# Altium PCB vt18_cpu_board.PcbDoc (part 2 of 7)
Units mil, origin at the board's own origin, x right, y up, seen from the top; angles counter-clockwise.
Board outline 2283.46 x 2244.09 mil, 8 copper layers (Top Layer, GND1, Signal Layer 1, POWER1, POWER2, Signal Layer 2, GND2, Bottom Layer), stack 66.304 mil thick; 339 components, 286 nets, 1965 pads, 1047 vias.
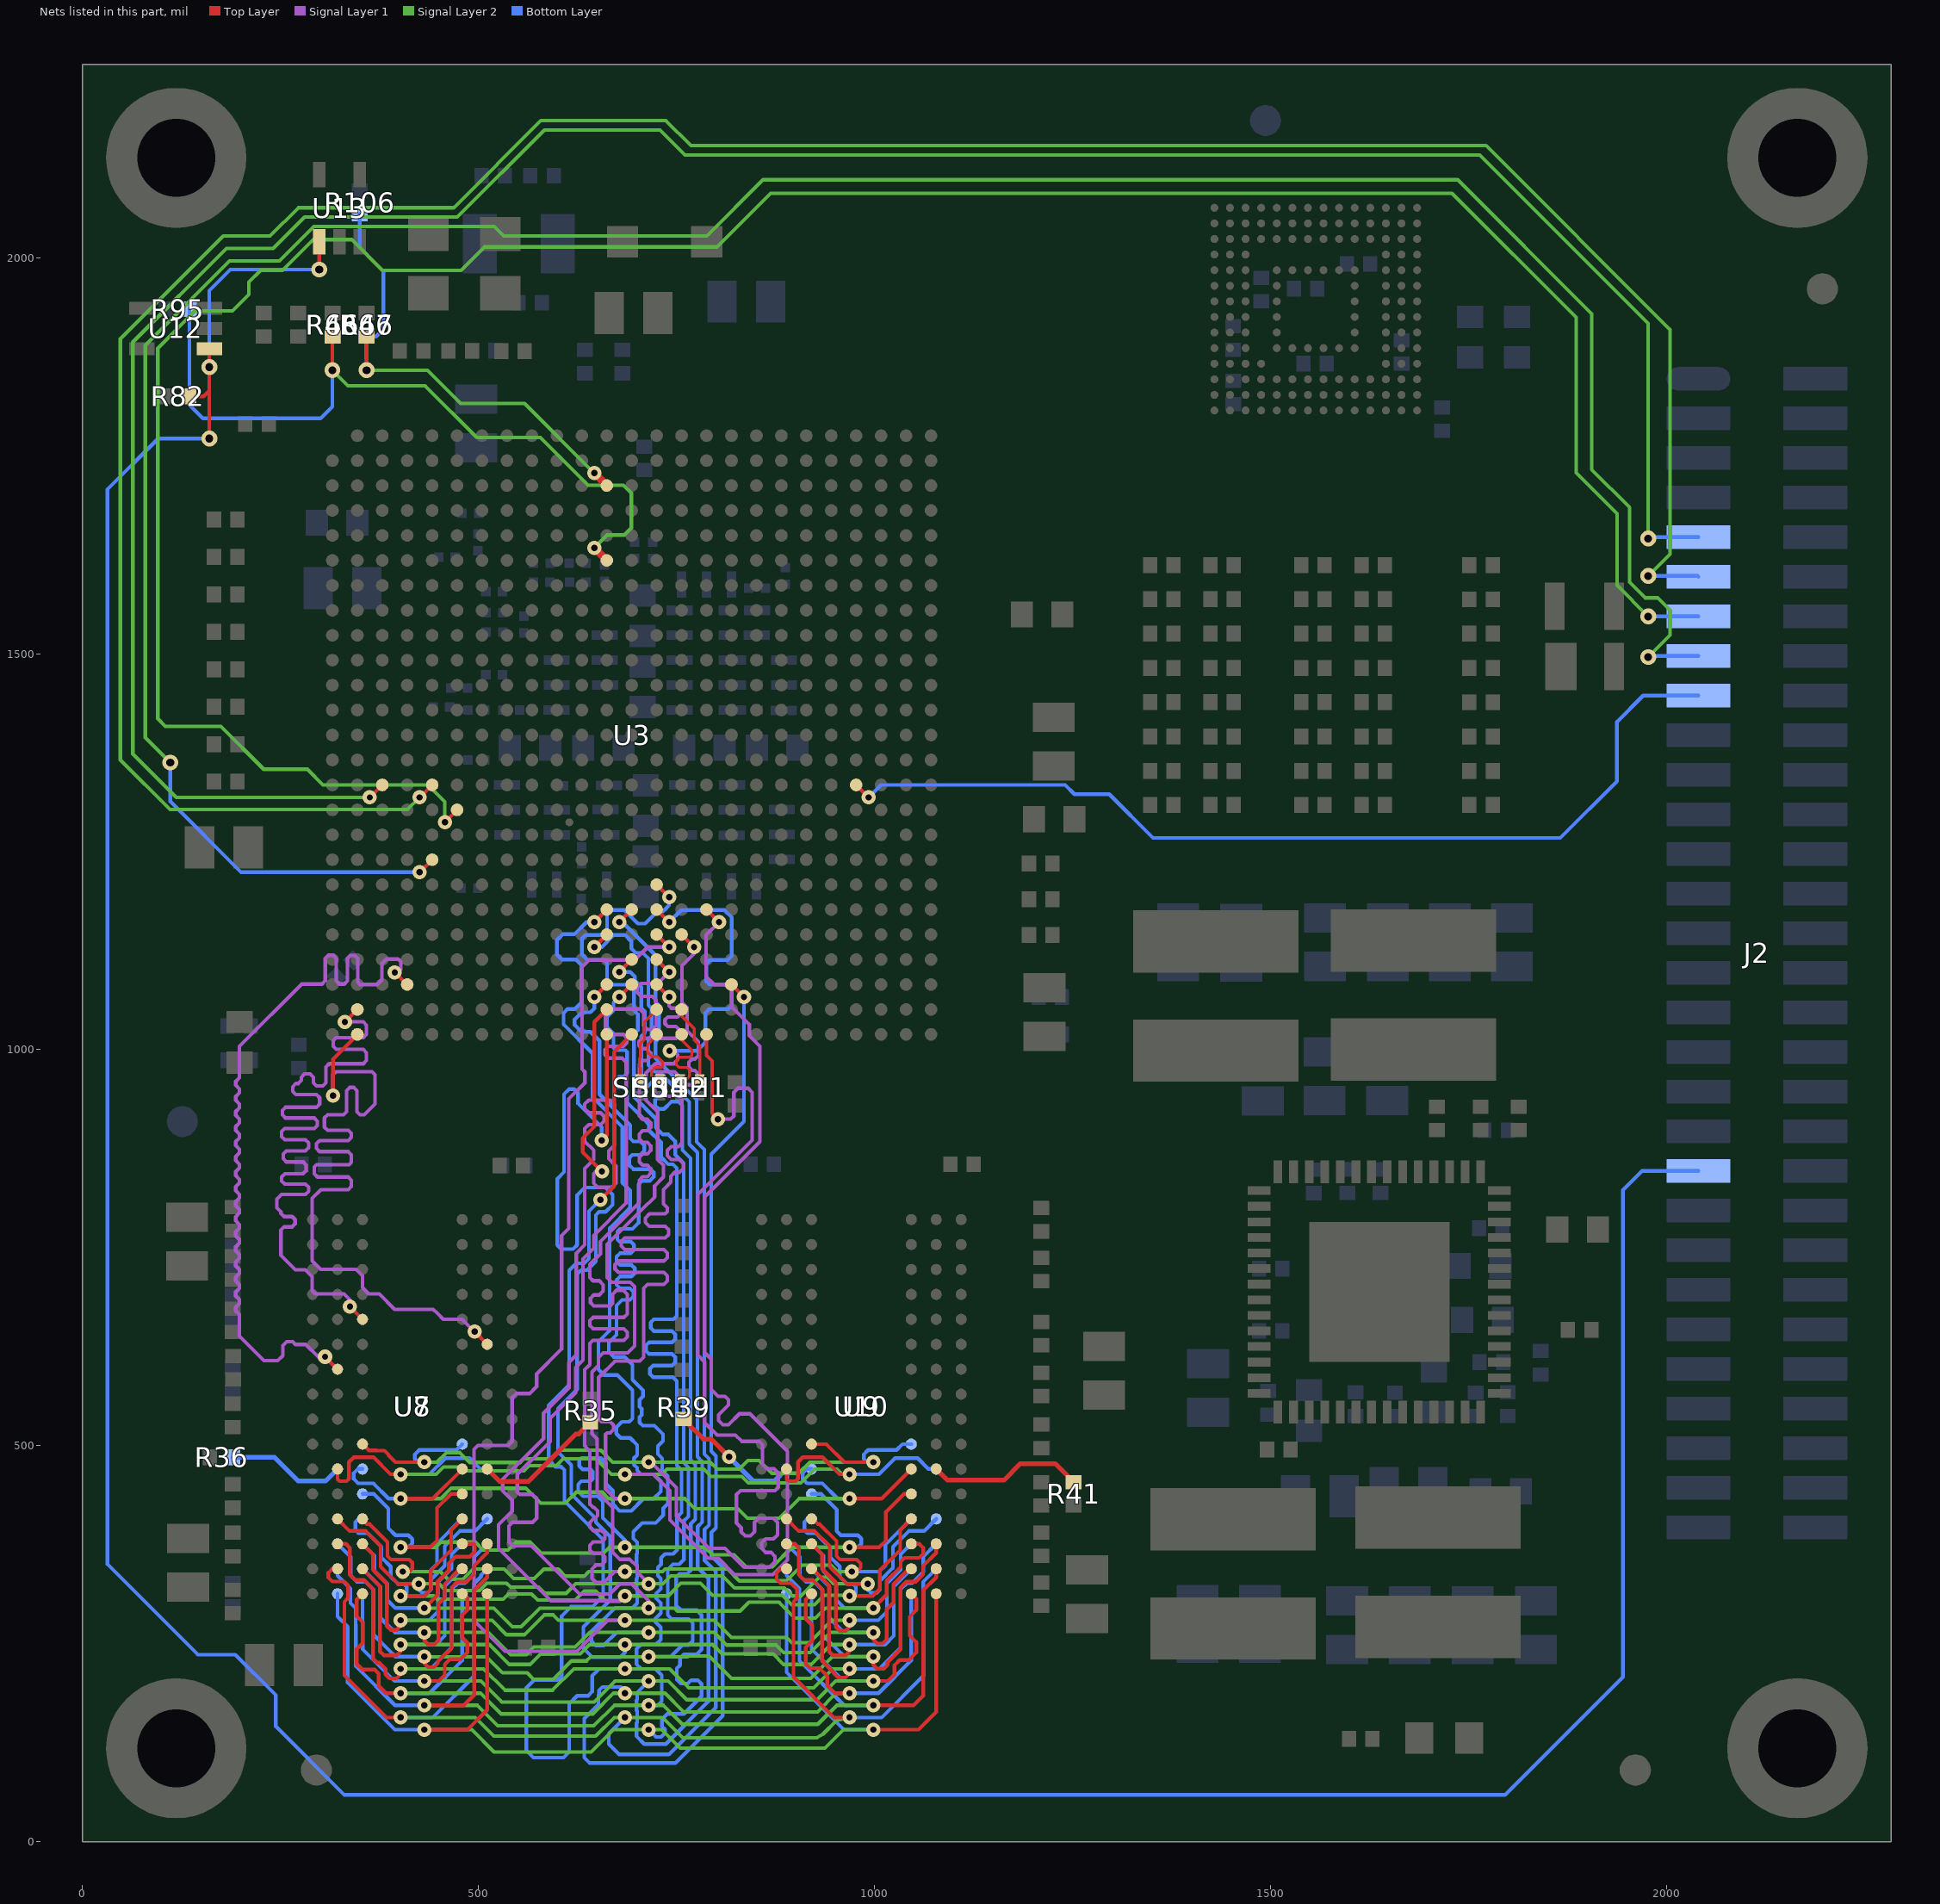
[diagram p8: the nets of this part, all layers, seen from the top]

## Part data
C1 C2 C3 C4 C5 C6 C7 C8 C9 C10 C11 C12 C13 C14 C15 C16 C17 C18 C19 C20 C21 C22 C23 C24 C25 C26 C27 C28 C29 C30 C31 C32 C33 C34 C35 C36 C37 C38 C39 C40 C41 C42 C43 C44 C45 C46 C47 C48 C49 C50 C51 C52 C53 C54 C55 C56 C57 C58 C59 C60 C61 C62 C63 C64 C65 C66 C67 C68 C69 C70 C71 C72 C73 C74 C75 C76 C77 C78 C79 C80 C81 C82 C83 C84 C85 C86 C87 C88 C89 C90 C91 C92 C93 C94 C95 C96 C97 C98 C99 C100 C101 C102 C103 C104 C105 C106 C107 C108 C109 C110 C111 C112 C113 C114 C115 C116 C117 C118 C119 C120 C121 C122 C123 C124 C125 C126 C127 C128 C129 C130 C131 C132 C133 C134 C135 C136 C137 C138 C139 C140 C141 C142 C143 C144 C145 C146 C147 C148 C149 C150 C151 C152 C153 C154 C155 C156 C157 C158 C159 C160 C161 C162 C163 C164 C165 C166 C167 C168 C169 C170 C171 C172 C173 C174 C175 C176 C177 C178 C179 C180 C181 C182 C183 C184 C185 C186 C187 C188 C189 C190 C191 C192 C193 C194 C195 C196 C197 C198: library part Cap, "Capacitor"
D1: library part LN01401_1
D2: library part "Diode 11DQ03", "Schottky Rectifier"
J2: library part "Header 30X2", "Header, 30-Pin, Dual row"
L1 L2: library part INDUCTOR, "IND PWR 1UH@100KHZ 2.65A 20% SMT"
L3 L4: library part INDUCTOR, "IND PWR 1UH@1MHZ 2A 30% SMT"
L5: library part Inductor, "Inductor"
R1 R2 R3 R4 R5 R6 R7 R8 R9 R10 R11 R12 R13 R14 R15 R16 R17 R18 R19 R20 R21 R22 R23 R24 R25 R26 R27 R28 R29 R30 R31 R32 R33 R34 R35 R36 R37 R38 R39 R40 R41 R42 R44 R45 R46 R47 R48 R49 R50 R51 R52 R53 R54 R55 R56 R57 R58 R59 R60 R61 R62 R63 R64 R65 R66 R67 R68 R69 R70 R71 R72 R73 R74 R75 R76 R77 R78 R79 R80 R81 R82 R83 R84 R85 R86 R87 R88 R89 R90 R91 R92 R93 R94 R95 R96 R97 R98 R99 R100 R101 R102 R103 R104 R105 R106 R107 R108 R109 R110 R111 R112 R113 R114 R115 R116 R117 R118: library part Res3, "Resistor"
SH1 SH2 SH3 SH4: library part RES_SHORT-2, "ZERO OHM CUT TRACE 0201 PADS; NO PART TO ORDER"
U1: library part MMPF0100NPZES_56P, "IC POWER MANAGEMENT 2.8-4.5V QFN56"
U2: library part eMMC-153BALL
U3: library part PCIMX6Q6VV1A, "IC MCU MX6QUAD ARM CORTEX-A9 FCPBGA624"
U7 U8 U9 U10: library part 2G_DDR3_SDRAM_128MX16_96P, "IC MEM DDR3 SDRAM 2Gb 128MX16 1.35V FBGA96"
U14: library part STM6315
Y1: library part XTAL_13Y_A, "XTAL 24MHZ -- 3.2X2.5MM SMT"
Y2: library part XTAL, "XTAL 32.768KHZ 12.5PF 20PPM 3.2X1.5MM SMT"

## Free pads (board coordinates)
  rect 216.54x216.54 on Bottom Solder: 1(118.11,118.11) 1(118.11,2125.98) 1(2165.35,118.11) 1(2165.35,2125.98)
  round 10 smd: EndPad(614.64,1287.1)
  round 177.17 hole 98.43: MT1(118.11,2125.98) MT2(2165.35,2125.98) MT3(118.11,118.11) MT4(2165.35,118.11)
  round 39.37 smd far side paste-19.68 mask+23.62: ""(125.98,909.34) ""(1493.68,2173.23) ""(1960.63,90.55)
  round 39.37 smd paste-19.68 mask+23.62: ""(295.28,90.55) ""(1960.63,90.55) ""(2196.85,1960.75)

## Via types
v1: diameter 18, hole 8, Top Layer to Bottom Layer, tented both sides, 718 vias
v2: diameter 20, hole 10, Top Layer to Bottom Layer, tented both sides, 300 vias
v3: diameter 25, hole 15, Top Layer to Bottom Layer, tented both sides, 27 vias
v4: diameter 17.99, hole 7.99, Top Layer to Bottom Layer, tented both sides, 2 vias

## Nets (pads, with @x,y where several pads share a name; then routed paths per layer and width w, separated by ;. In a path a pad name is that pad's centre, name@x,y a point inside that pad or via, vN(x,y) a via of type N, cw(c..) or ccw(c..) an arc to the next point about the centre after c; other vN are vias at no path point)
ACC: J2.17 U3.R22 | length 1222.7
  Top Layer w4.7: U3.R22@976.84,1334.35 v1(992.59,1318.61)
  Bottom Layer w4.7: v1(992.59,1318.61) 1008.34,1334.36 1240.63,1334.35 1252.44,1322.54 1296.46,1322.54 1351.57,1267.43 1865.9,1267.43 1937.48,1339 1937.48,1414.05 1970.47,1447.05 J2.17@2040.35,1447.05
BM-SEL: J2.41 R82.2 U12.1 U13.1 | length 4774.5
  Top Layer w4.5: v2(298.89,1985) U13.1@298.89,2019.96
  Top Layer w4.7: R82.2@134.52,1825 152.83,1825 160,1832.17 ; v2(160,1771.65) 160,1832.17 ; U12.1@160,1885 v2(160,1861.91) 160,1832.17
  Bottom Layer w4.5: v2(160,1861.91) 160,1958.24 186.76,1985 v2(298.89,1985)
  Bottom Layer w4.7: v2(160,1771.65) 95.47,1771.65 31.5,1707.68 31.5,350.39 145.67,236.22 192.91,236.22 244.09,185.04 244.09,145.67 330.71,59.06 1796.03,59.06 1944.88,207.9 1944.88,822.77 1969.16,847.05 J2.41@2040.35,847.05
BOOT-MODE0: R47.1 R66.2 R106.1 U3.C12 | length 631.3
  Top Layer w4.5: v2(358.74,1857.98) v2(358.74,1857.98) 358.78,1872.67
  Top Layer w4.7: 358.78,1872.67 R47.1@358.78,1900.59
  Top Layer w10: v1(646.13,1728.05) U3.C12@661.88,1712.3
  Signal Layer 2 w4.5: v2(358.74,1857.98) 435.38,1857.98 477.36,1816 558.18,1816 v1(646.13,1728.05)
  Bottom Layer w4.7: R106.1@350,2055 350,2012.67 380,1982.67 380,1910 370.59,1900.59 R66.2@358.78,1900.59 v2(358.74,1857.98) v2(358.74,1857.98)
BOOT-MODE1: R46.1 R65.2 R95.1 U3.F12 | length 1011.2
  Top Layer w4.5: v2(315.43,1857.98) v2(315.43,1857.98) 315.48,1872.5
  Top Layer w4.7: 315.48,1872.5 R46.1@315.48,1900.59
  Top Layer w10: v1(646.13,1633.56) U3.F12@661.88,1617.81
  Signal Layer 2 w4.5: v2(315.43,1857.98) 335.11,1838.29 432.5,1838.29 497.8,1773 578,1773 638.15,1712.85 682.82,1712.85 692.98,1702.69 692.98,1658.92 683.93,1649.86 662.43,1649.86 v1(646.13,1633.56)
  Bottom Layer w4.7: R95.1@135,1935 135,1814 151.95,1797.05 300.52,1797.05 315.43,1811.96 v2(315.43,1857.98) 315.43,1900.55 R65.2@315.48,1900.59
CAN1-RXD: J2.11 U3.R5 | length 3534.8
  Top Layer w4.7: v1(425.66,1318.61) U3.R5@441.41,1334.35
  Signal Layer 2 w4.5: v1(425.66,1318.61) 410.23,1303.17 110.39,1303.17 47.71,1365.85 47.71,1897.35 177.63,2027.27 236.69,2027.27 272.41,2062.99 468.5,2062.99 578.74,2173.23 736.4,2173.23 768.18,2141.44 1772.12,2141.44 2004.4,1909.16 2004.4,1625.69 v2(1976.85,1598.13) v2@1980.78,1598.13
  Bottom Layer w4.7: v2(1976.85,1598.13) 2039.27,1598.13 J2.11@2040.35,1597.05
CAN1-TXD: J2.9 U3.R3 | length 3325.4
  Top Layer w4.7: v1(362.67,1318.61) U3.R3@378.42,1334.35
  Signal Layer 2 w4.5: v1(362.67,1318.61) 118.34,1318.61 63.46,1373.49 63.46,1893.41 181.57,2011.52 240.7,2011.52 280.36,2051.18 473.18,2051.18 583.13,2161.13 729.1,2161.13 760.6,2129.63 1764.25,2129.63 1976.85,1917.03 v2(1976.85,1645.38)
  Bottom Layer w4.7: v2(1976.85,1645.38) 1978.51,1647.05 J2.9@2040.35,1647.05
CAN2-RX: J2.15 U3.V5 | length 3515.2
  Top Layer w4.7: v1(425.66,1224.11) U3.V5@441.41,1239.86
  Signal Layer 2 w4.5: v2(110.7,1362.62) 79.21,1394.12 79.21,1889.47 185.51,1995.77 248.58,1995.77 292.17,2039.37 519.86,2039.37 531.96,2027.27 788.15,2027.27 859.31,2098.43 1736.22,2098.43 1905.51,1929.13 1905.51,1732.46 1953.22,1684.75 1953.22,1590.26 1972.91,1570.57 1988.66,1570.57 2004.4,1554.83 2004.4,1523.33 v2(1976.85,1495.77)
  Bottom Layer w4.7: v2(110.7,1362.62) 110.7,1313.56 200.15,1224.11 v1(425.66,1224.11) ; v2(1976.85,1495.77) 1978.12,1497.05 J2.15@2040.35,1497.05
CAN2-TX: J2.13 U3.T6 | length 3378.6
  Top Layer w4.7: v1@457.39,1287.11 v1(457.39,1287.33) U3.T6@472.91,1302.85
  Signal Layer 2 w4.5: v1(457.39,1287.33) 457.39,1313.04 436.08,1334.35 303.62,1334.35 283.82,1354.15 228.7,1354.15 174.56,1408.29 104.55,1408.29 94.96,1417.89 94.96,1885.54 142.2,1932.78 189.44,1932.78 210,1953.34 210,1969.08 224.88,1983.96 252.44,1983.96 291.34,2022.86 339.8,2022.86 378.71,1983.96 477.97,1983.96 507.54,2013.53 800.93,2013.53 868.66,2081.26 1729.15,2081.26 1885.83,1924.59 1885.83,1728.52 1937.48,1676.87 1937.48,1586.32 v2(1976.85,1546.95)
  Bottom Layer w4.7: v2(1976.85,1546.95) 1976.94,1547.05 J2.13@2040.35,1547.05
DDR_SDCLK0: SH1.1 U3.AD15 | length 97.6
  Top Layer w3.7: U3.AD15@756.37,1050.88 756.37,1042.35 772.12,1026.6 772.12,1012.34 779.38,1005.08 SH1.1@779.38,962.85
DDR_SDCLK0_B: SH2.1 U3.AE15 | length 99.9
  Top Layer w3.7: SH2.1@754.38,962.85 762.38,962.85 766.14,966.61 766.14,974.58 763.08,977.64 753.1,977.64 749.38,981.36 749.38,985.88 753.84,990.34 766.38,990.34 769.38,993.34 769.38,999.34 756.37,1012.35 U3.AE15@756.37,1019.39
DDR_SDCLK1: SH3.1 U3.AD14 | length 97.4
  Top Layer w3.7: SH3.1@704.38,962.85 704.38,977.34 703.38,978.34 703.38,989.34 704.38,990.34 704.38,1008.12 709.13,1012.86 709.13,1035.14 U3.AD14@724.88,1050.88
DDR_SDCLK1_B: SH4.1 U3.AE14 | length 92.3
  Top Layer w3.7: U3.AE14@724.88,1019.39 724.88,1018.17 716.83,1010.12 716.83,1009.66 713.38,1006.21 713.38,996.34 718.38,991.34 725.72,991.34 732.38,984.68 732.38,979.34 730.38,977.34 722.62,977.34 718.38,973.1 718.38,967.09 722.62,962.85 SH4.1@729.38,962.85
DRAM0_ZQ: R35.2 U8.L8 | length 167.6
  Top Layer w6: U8.L8@510.93,470.61 526.69,454.85 562.88,454.85 622.95,514.92 626.44,514.92 R35.2@641.1,529.58
DRAM1_ZQ: R36.2 U7.L8 | length 150.6
  Bottom Layer w6: R36.2@190.14,485.34 242.38,485.34 272.38,455.34 306.7,455.34 U7.L8@321.96,470.61
DRAM2_ZQ: R41.2 U10.L8 | length 197.7
  Top Layer w6: U10.L8@1077.86,470.61 1092.08,456.4 1163.34,456.4 1184.29,477.34 1228.14,477.34 R41.2@1251.38,454.1
DRAM3_ZQ: R39.2 U9.L8 | length 168.9
  Top Layer w6: R39.2@758.7,533.58 783.94,508.34 793.84,508.34 v1(816.38,485.8)
  Bottom Layer w6: v1(816.38,485.8) 846.84,455.34 873.38,455.34 879.68,461.64 879.93,461.64 U9.L8@888.89,470.61
DRAM_A0: U3.AC14 U7.N3 U8.N3 U9.N3 U10.N3 | length 2366.3
  Top Layer w4.7: U8.N3@353.45,407.62 353.46,406.53 358.95,401.04 362.37,401.04 385.08,378.33 385.08,360.71 389.45,356.34 412.38,356.34 416.1,352.62 416.1,344.81 412.38,341.09 v1(404.45,341.09) ; U3.AC14@724.88,1082.38 v1(740.62,1066.63) ; U10.N3@920.38,407.62 922.12,407.61 928.69,401.04 930.61,401.04 952.01,379.64 952.01,360.71 956.38,356.34 977.38,356.34 982.38,351.34 982.38,346.09 977.38,341.09 v1(971.38,341.09)
  Signal Layer 1 w4.5: v1(684.88,341.09) 672.13,341.09 658.38,327.34 648.38,327.34 643.38,332.34 643.38,344.47 648.38,349.47 655.13,349.47 659.38,353.72 659.38,359.72 655.13,363.97 644.63,363.97 640.38,368.22 640.38,374.22 644.63,378.47 655.13,378.47 659.38,382.72 659.38,388.72 655.13,392.97 644.63,392.97 640.38,397.22 640.38,403.22 644.63,407.47 646.13,407.47 650.38,411.72 650.38,417.72 646.13,421.97 644.63,421.97 640.38,426.22 640.38,493.34 633.94,499.78 633.94,595.91 640.38,602.34 640.38,629.09 644.38,633.09 683.61,633.09 687.86,637.34 687.86,643.34 683.61,647.59 644.63,647.59 640.38,651.84 640.38,657.84 644.63,662.09 683.61,662.09 687.86,666.34 687.86,691.34 682.86,696.34 674.38,696.34 669.38,691.34 669.38,679.59 666.38,676.59 645.41,676.59 641.38,680.62 641.38,686.31 645.41,690.34 652.38,690.34 657.38,695.34 657.38,703.34 652.38,708.34 644.56,708.34 640.56,712.34 640.56,729.02 653.88,742.34 653.88,757.84 702.87,806.83 702.87,835.36 707.12,839.61 713.13,839.61 717.38,843.86 717.38,849.86 713.13,854.11 707.12,854.11 702.87,858.36 702.87,864.36 707.12,868.61 713.13,868.61 717.38,872.86 717.38,878.86 713.13,883.11 707.12,883.11 702.87,887.36 702.87,893.36 707.12,897.61 713.13,897.61 717.38,901.86 717.38,907.86 713.13,912.11 707.12,912.11 702.87,916.36 702.87,981.34 707.87,986.34 712.38,986.34 717.38,991.34 717.38,996.34 712.38,1001.34 706.19,1001.34 702.38,1005.15 702.38,1010.53 706.19,1014.34 749.38,1014.34 754.38,1019.34 754.38,1024.34 749.38,1029.34 738.9,1029.34 735.38,1032.86 735.38,1037.82 738.9,1041.34 751.11,1041.34 754.38,1044.61 754.38,1049.23 751.11,1052.5 743.38,1052.5 740.62,1055.26 v1(740.62,1066.63)
  Signal Layer 2 w4.5: v1(404.45,341.09) 451.63,341.09 461.38,331.34 480.29,331.34 493.29,344.34 532.38,344.34 544.38,332.34 570.38,332.34 582.16,344.12 600.6,344.12 609.38,335.34 633.38,335.34 639.13,341.09 v1(684.88,341.09) 732.38,341.09 735.63,344.34 814.38,344.34 829.38,329.34 888.29,329.34 908.29,349.34 944.88,349.34 953.13,341.09 v1(971.38,341.09)
  Bottom Layer w4.7: v1(404.45,341.09) 437.81,341.09 447.45,350.74 447.45,376.41 478.65,407.61 U7.N3@479.44,407.62 ; v1(971.38,341.09) 1005.86,341.09 1013.73,348.96 1013.73,375.08 1014.61,375.95 1039.7,401.04 1039.8,401.04 U9.N3@1046.37,407.62
DRAM_A1: U3.AB14 U7.P7 U8.P7 U9.P7 U10.P7 | length 2428.4
  Top Layer w4.7: v1(431.45,295.04) 448.5,312.09 448.5,328.77 462.38,342.65 462.38,351.34 470.83,359.79 488.83,359.79 495.38,366.34 495.38,374.14 493.41,376.11 U8.P7@479.43,376.12 ; U3.AB14@724.88,1113.88 v1(740.62,1098.13) ; v1(998.38,295.04) 1015.43,312.09 1015.43,329.39 1033.02,346.98 1033.02,353.5 1038.02,358.5 1056.38,358.5 1061.38,363.5 1061.38,371.11 1056.38,376.11 U10.P7@1046.36,376.12
  Signal Layer 1 w4.5: v1(714.88,295.04) 714.88,304.17 693.41,325.64 678.56,325.64 665.76,312.84 627.28,312.84 566.5,373.61 543.38,373.61 538.38,378.61 538.38,398.84 542.88,403.34 568.38,403.34 573.38,408.34 573.38,416.98 573.43,417.04 573.43,429.67 573.38,429.73 573.38,433.61 568.38,438.61 552.11,438.61 548.93,441.79 548.93,463.86 590.53,505.46 590.53,534.49 622.63,566.59 622.63,598.59 631.88,607.84 631.88,735.84 645.38,749.34 645.38,765.34 686.38,806.34 686.38,984.34 681.38,989.34 663.77,989.34 659.38,993.73 659.38,999.95 663.77,1004.34 682.99,1004.34 687.38,1008.73 687.38,1014.95 682.99,1019.34 665.38,1019.34 660.38,1024.34 660.38,1042.31 669.45,1051.38 703.38,1051.38 708.38,1046.38 708.38,1030.34 713.38,1025.34 719.38,1025.34 724.38,1030.34 724.38,1062.34 719.38,1067.34 705.18,1067.34 700.38,1072.14 700.38,1078.93 705.18,1083.73 726.23,1083.73 v1(740.62,1098.13)
  Signal Layer 2 w4.5: v1(431.45,295.04) 519.18,295.04 542.83,271.39 553.77,271.39 577.42,295.04 v1(714.88,295.04) 747.38,295.04 751.08,291.34 830.38,291.34 841.38,302.34 879.38,302.34 899.38,282.34 925.38,282.34 938.08,295.04 v1(998.38,295.04)
  Bottom Layer w4.7: U7.P7@353.46,376.12 368.45,361.12 368.45,341.88 384.78,325.55 384.78,305.35 395.09,295.04 v1(431.45,295.04) ; U9.P7@920.39,376.12 935.38,361.12 935.38,341.88 951.71,325.55 951.71,305.35 962.02,295.04 v1(998.38,295.04)
DRAM_A2: U3.AA14 U7.P3 U8.P3 U9.P3 U10.P3 | length 2485.7
  Top Layer w4.7: U8.P3@353.45,376.12 366.81,362.76 366.81,343.54 384.21,326.13 384.21,272.34 389.21,267.34 396.45,267.34 401.45,272.34 v1(401.45,279.69) ; U3.AA14@724.88,1145.37 v1(740.62,1129.62) ; U10.P3@920.38,376.12 933.74,362.76 933.74,344.68 951.14,327.28 951.14,271.34 956.14,266.34 963.38,266.34 968.38,271.34 v1(968.38,279.69)
  Signal Layer 1 w4.5: 604.85,684.99 604.85,622.01 573.37,590.53 573.37,574.77 564.44,565.84 547.38,565.84 542.38,560.84 542.38,505.34 537.38,500.34 499.38,500.34 494.38,495.34 494.38,279.34 533.38,240.34 624.03,240.34 663.38,279.69 v1(684.88,279.69) ; 604.87,685.01 604.87,729.14 ; 604.85,729.15 604.85,765.31 613.88,774.34 613.88,937.84 634.28,958.24 634.28,972.01 630.89,975.4 630.89,1104.45 639.82,1113.38 697.42,1113.38 713.66,1129.62 v1(740.62,1129.62)
  Signal Layer 2 w4.5: v1(401.45,279.69) 517.03,279.69 535.33,261.39 557.83,261.39 582.83,286.39 594.2,286.39 600.9,279.69 v1(684.88,279.69) 797.54,279.69 819.38,257.85 888.87,257.85 895.33,251.39 917.83,251.39 946.14,279.69 v1(968.38,279.69)
  Bottom Layer w4.7: v1(401.45,279.69) 437.81,279.69 448.69,290.57 448.69,327.37 466.09,344.77 466.09,362.76 U7.P3@479.44,376.12 ; v1(968.38,279.69) 1004.74,279.69 1015.62,290.57 1015.62,325.86 1033.02,343.26 1033.02,362.76 U9.P3@1046.37,376.12
DRAM_A3: U3.Y14 U7.N2 U8.N2 U9.N2 U10.N2 | length 2482.6
  Top Layer w4.7: U8.N2@321.95,407.62 337.23,392.34 357.38,392.34 376.38,373.34 376.38,347.41 398.05,325.74 v1(424.45,325.74) ; U3.Y14@724.88,1176.87 v1(740.62,1161.12) ; U10.N2@888.88,407.62 904.16,392.34 924.31,392.34 943.31,373.34 943.31,347.41 964.98,325.74 v1(991.38,325.74)
  Signal Layer 1 w4.5: v1(714.88,325.74) 700.13,340.49 700.13,347.41 691.2,356.34 690.58,356.34 690.38,356.54 678.56,356.54 669.38,365.72 669.38,422.15 649.71,441.83 649.71,508.7 643.13,515.28 643.13,593.07 651.4,601.34 651.4,611.36 657.38,617.34 688.38,617.34 696.88,625.84 696.88,700.84 691.38,706.34 668.38,706.34 662.38,712.34 662.38,754.28 706.4,798.29 722.38,814.27 722.38,828.34 733.38,839.34 733.38,854.34 726.13,861.59 726.13,921.59 711.38,936.34 711.38,970.34 723.38,982.34 746.38,982.34 751.38,987.34 751.38,993.64 746.38,998.64 v1(741.13,998.64)
  Signal Layer 2 w4.5: v1(424.45,325.74) 449.98,325.74 458.38,317.34 501.33,317.34 510.38,326.39 535.33,326.39 540.38,321.34 575.64,321.34 583.36,313.62 610.66,313.62 622.78,325.74 v1(714.88,325.74) 732.78,325.74 742.88,335.84 807.88,335.84 823.38,320.34 886.39,320.34 896.39,310.34 906.79,310.34 930.33,333.89 939.83,333.89 947.98,325.74 v1(991.38,325.74)
  Bottom Layer w4.7: v1(424.45,325.74) 424.45,318.34 428.45,314.34 435.99,314.34 439.99,318.34 439.99,330.97 457.39,348.37 457.39,373.35 476.38,392.34 495.67,392.34 U7.N2@510.94,407.62 ; v1(740.62,1161.12) 755.97,1176.47 810.25,1176.47 819.76,1166.96 819.76,1118.34 814.9,1113.48 792.47,1113.48 787.47,1108.48 787.47,1091.77 787.38,1091.68 787.38,1086.34 791.74,1081.98 815.38,1081.98 819.76,1077.6 819.76,1055.66 815.38,1051.28 791.38,1051.28 786.38,1046.28 786.38,1009.34 775.68,998.64 v1(741.13,998.64) ; v1(991.38,325.74) 991.38,318.34 995.38,314.34 1002.92,314.34 1006.92,318.34 1006.92,329.47 1023.31,345.86 1023.31,372.34 1043.31,392.34 1062.6,392.34 U9.N2@1077.87,407.62
DRAM_A4: U3.W14 U7.P8 U8.P8 U9.P8 U10.P8 | length 2741.1
  Top Layer w4.7: v1(431.45,233.64) 431.45,225.34 436.45,220.34 443.68,220.34 448.68,225.34 448.68,227.64 460.15,239.11 461.09,239.11 466.09,244.11 466.09,320.98 473.45,328.34 485.17,328.34 494.31,337.48 494.31,348.27 510.94,364.9 U8.P8@510.93,376.12 ; U3.W14@724.88,1208.36 v1(740.62,1192.62) ; v1(998.38,233.64) 998.38,223.34 1003.38,218.34 1011.58,218.34 1016.58,223.34 1016.58,226.74 1032.83,242.99 1032.83,320.79 1040.38,328.34 1052.1,328.34 1061.24,337.48 1061.24,348.2 1077.87,364.83 U10.P8@1077.86,376.12
  Signal Layer 2 w4.5: v1(431.45,233.64) 510.08,233.64 530.38,213.34 561.38,213.34 569.38,205.34 594.38,205.34 617.38,228.34 636.38,228.34 641.68,233.64 v1(714.88,233.64) 764.11,233.64 765.06,234.59 791.13,234.59 819.38,206.34 919.38,206.34 946.68,233.64 v1(998.38,233.64)
  Bottom Layer w4.7: U7.P8@321.96,376.12 338.45,359.62 338.45,336.34 346.45,328.34 357.37,328.34 367.38,318.33 367.38,290.07 367.24,289.93 367.24,261.55 386.1,242.69 386.1,242.63 395.09,233.64 v1(431.45,233.64) ; 696.68,1050.09 696.98,1049.79 696.98,1049.09 700.98,1045.09 700.98,1024.48 696.68,1020.18 696.38,1019.87 696.38,940.34 724.03,912.69 724.03,901.69 732.73,892.99 739.7,892.99 748.38,884.32 748.38,867.34 758.97,856.75 758.97,478.67 764.48,473.17 765.04,472.61 765.04,454.9 ; 696.68,1050.1 696.38,1050.4 696.38,1075.34 689.74,1081.98 669.74,1081.98 662.28,1089.44 662.28,1109.44 658.24,1113.48 637.24,1113.48 630.38,1120.34 630.38,1139.97 635.38,1144.97 655.01,1144.97 662.28,1152.24 662.28,1171.47 667.28,1176.47 683.99,1176.47 701.17,1159.29 710.33,1159.29 723.05,1172 729.79,1172 734.26,1176.47 734.76,1176.47 740.62,1182.34 v1(740.62,1192.62) ; v1(714.88,233.64) 742.68,233.64 757.38,248.34 765.38,248.34 770.38,253.34 770.38,276.34 765.38,281.34 743.93,281.34 738.93,286.34 738.93,343.89 745.38,350.34 753.38,350.34 759.38,356.34 759.38,405.11 765.03,410.76 765.03,454.89 ; U9.P8@888.89,376.12 905.38,359.62 905.38,336.34 913.38,328.34 924.06,328.34 934.31,318.09 934.31,290.07 934.17,289.93 934.17,261.55 953.03,242.69 953.03,242.63 962.02,233.64 v1(998.38,233.64)
DRAM_A5: U3.AE13 U7.P2 U8.P2 U9.P2 U10.P2 | length 2814.6
  Top Layer w4.7: U8.P2@321.95,376.12 332.45,376.11 337.45,371.11 337.45,337.34 344.45,330.34 355.38,330.34 366.81,318.91 366.81,231.04 371.81,226.04 374.68,226.04 382.54,218.18 382.54,211.34 387.54,206.34 396.45,206.34 401.45,211.34 v1(401.45,218.29) ; v1(653.88,810.64) 671.13,827.89 671.13,997.14 U3.AE13@693.38,1019.39 ; U10.P2@888.88,376.12 899.38,376.11 904.38,371.11 904.38,337.34 911.38,330.34 922.05,330.34 933.74,318.65 933.74,228.29 949.01,213.02 949.01,212.34 954.01,207.34 963.38,207.34 968.38,212.34 v1(968.38,218.29)
  Signal Layer 2 w4.5: v1(401.45,218.29) 506.43,218.29 533.33,191.39 593.43,191.39 620.33,218.29 v1(684.88,218.29) 741.38,218.29 765.33,194.34 923.38,194.34 947.33,218.29 v1(968.38,218.29)
  Bottom Layer w4.7: v1(401.45,218.29) 439.23,218.29 466.09,245.16 466.09,318.12 466.09,318.65 473.91,326.48 482.51,326.48 494.45,338.41 494.45,359.62 U7.P2@510.94,376.12 ; v1(653.88,810.64) 639.38,796.14 639.38,736.34 633.38,730.34 623.38,730.34 614.48,721.44 614.48,576.83 588.54,550.88 588.54,482.19 597.38,473.34 604.38,473.34 608.38,469.34 608.38,430.34 657.38,381.34 657.38,310.34 643.68,296.64 616.68,296.64 605.03,284.99 605.03,209.34 600.03,204.34 570.38,204.34 560.38,194.34 560.38,115.34 569.38,106.34 607.38,106.34 614.38,113.34 614.38,174.34 624.38,184.34 638.38,184.34 643.38,189.34 643.38,209.34 652.33,218.29 v1(684.88,218.29) ; v1(968.38,218.29) 1006.16,218.29 1033.02,245.16 1033.02,318.65 1040.84,326.48 1047.51,326.48 1061.38,340.34 1061.38,359.62 U9.P2@1077.87,376.12
DRAM_A6: U3.AC13 U7.R8 U8.R8 U9.R8 U10.R8 | length 2815.1
  Top Layer w4.7: v1(431.45,172.24) 481.35,172.24 494.45,185.34 494.45,317.34 510.94,333.83 U8.R8@510.93,344.63 ; v1(677.63,1066.63) U3.AC13@693.38,1082.38 ; v1(998.38,172.24) 1049.38,172.24 1061.38,184.24 1061.38,317.34 1077.87,333.83 U10.R8@1077.86,344.63
  Signal Layer 2 w4.5: v1(431.45,172.24) 498.48,172.24 524.33,146.39 645.53,146.39 671.38,172.24 v1(714.88,172.24) 733.38,172.24 757.28,148.34 928.38,148.34 952.28,172.24 v1(998.38,172.24)
  Bottom Layer w4.7: U7.R8@321.96,344.63 321.96,335.83 338.24,319.55 338.24,301.39 344.76,294.87 344.76,274.1 344.87,273.99 344.87,221.92 394.55,172.24 v1(431.45,172.24) ; v1(677.63,1066.63) 670.38,1059.38 670.38,1049.6 662.28,1041.5 662.28,1028.78 670.38,1020.68 670.38,1002.34 673.38,999.34 685.38,999.34 687.38,997.34 687.38,970.34 683.38,966.34 677.38,966.34 672.38,961.34 672.38,956.34 676.38,952.34 682.38,952.34 687.38,947.34 687.38,933.58 705.93,915.03 709.08,911.87 715.33,905.61 715.33,898.08 730.38,883.03 730.38,864.34 739.38,855.34 745.38,855.34 750.27,850.45 750.27,663.72 746.27,659.72 721.38,659.72 717.38,655.72 717.38,648.74 721.38,644.74 744.38,644.74 748.38,640.74 748.38,634.65 744.38,630.65 715.38,630.65 711.78,627.05 711.78,619.55 715.38,615.95 744.38,615.95 748.38,611.95 748.38,605.25 744.38,601.25 720.38,601.25 716.38,597.25 716.38,590.55 720.38,586.55 745.38,586.55 750.27,581.66 750.27,475.06 755.78,469.56 756.33,469.01 756.33,415.53 750.68,409.88 750.68,368.34 745.68,363.34 735.38,363.34 730.38,358.34 730.38,350.23 726.38,346.23 726.38,335.95 730.23,332.1 730.23,319.38 724.38,313.53 724.38,307.25 730.23,301.4 730.23,288.68 723.38,281.83 723.38,277.55 730.23,270.7 730.23,255.19 724.03,248.99 705.03,248.99 699.38,243.34 699.38,224.34 705.43,218.29 723.43,218.29 731.38,210.34 731.38,177.34 726.28,172.24 v1(714.88,172.24) ; U9.R8@888.89,344.63 888.89,335.83 905.17,319.55 905.17,228.55 961.48,172.24 v1(998.38,172.24)
DRAM_A7: U3.Y13 U7.R2 U8.R2 U9.R2 U10.R2 | length 2917.1
  Top Layer w4.7: U8.R2@321.95,344.63 315.38,344.62 310.38,339.62 310.38,333.58 315.38,328.58 330.31,328.58 335.31,323.58 335.31,307.59 330.66,302.94 330.66,210.05 383.84,156.89 v1(401.45,156.89) ; v1(677.63,1161.12) U3.Y13@693.38,1176.87 ; U10.R2@888.88,344.63 881.38,344.62 876.38,339.62 876.38,331.47 881.37,326.48 894.41,326.48 902.24,318.65 902.24,307.59 897.59,302.94 897.59,208.13 948.83,156.89 v1(968.38,156.89)
  Signal Layer 2 w4.5: v1(401.45,156.89) 495.83,156.89 519.38,133.34 647.83,133.34 671.38,156.89 v1(684.88,156.89) 732.38,156.89 757.88,131.39 927.33,131.39 934.88,135.84 951.88,152.84 v1(968.38,156.89)
  Bottom Layer w4.7: v1(401.45,156.89) 442,156.89 494.45,209.34 494.45,326.1 503.15,334.8 503.15,336.83 U7.R2@510.94,344.63 ; v1(677.63,1161.12) 681.6,1161.12 723.38,1119.34 723.38,1060.31 727.78,1055.91 727.78,1014.36 727.08,1013.66 723.38,1009.95 723.38,989.05 775.38,937.05 775.38,883.65 785.07,873.96 785.07,489.5 790.58,484 791.14,483.44 791.14,444.07 791.13,399.95 785.48,394.3 785.48,355.24 799.68,341.04 799.68,169.64 740.38,110.34 677.38,110.34 664.38,123.34 664.38,136.34 v1@684.88,156.84 ; v1(968.38,156.89) 1008.93,156.89 1061.38,209.34 1061.38,328.03 1070.08,336.73 1070.08,336.83 U9.R2@1077.87,344.63
DRAM_A8: U3.AB13 U7.T8 U8.T8 U9.T8 U10.T8 | length 2809.3
  Top Layer w4.7: v1(431.45,141.54) 486.14,141.54 510.94,166.34 U8.T8@510.93,313.13 ; v1(677.63,1098.13) U3.AB13@693.38,1113.88 ; v1(998.38,141.54) 1055.58,141.54 1077.87,163.83 U10.T8@1077.86,313.13
  Signal Layer 2 w4.5: v1(431.45,141.54) 491.38,141.54 519.58,113.34 642.18,113.34 670.48,141.64 714.78,141.64 v1(714.88,141.54) 731.38,141.54 754.58,118.34 937.38,118.34 960.58,141.54 v1(998.38,141.54)
  Bottom Layer w4.7: U7.T8@321.96,313.13 321.96,284.29 334.87,271.39 334.87,200.92 394.25,141.54 v1(431.45,141.54) ; v1(677.63,1098.13) 691.49,1098.13 697.38,1092.24 697.38,1087.34 705.38,1079.34 705.38,1053.7 705.68,1053.4 705.68,1052.7 709.68,1048.7 709.68,1020.87 705.38,1016.57 705.38,955.34 707.38,953.34 713.38,953.34 719.51,959.47 727.88,959.47 733.38,953.97 733.38,947.34 722.75,936.71 722.75,929.97 727.51,925.21 734.25,925.21 743.38,934.34 752.38,934.34 757.38,929.34 757.38,873.34 767.67,863.05 767.67,482.28 773.18,476.78 773.74,476.22 773.74,451.29 773.73,407.15 768.08,401.5 768.08,343.04 763.38,338.34 753.68,338.34 749.38,334.04 749.38,298.34 755.38,292.34 775.68,292.34 781.68,286.34 781.68,242.64 775.38,236.34 759.38,236.34 754.38,231.34 754.38,222.88 750.38,218.88 750.38,204.7 755.38,199.7 764.09,199.7 768.38,203.99 777.03,203.99 781.68,199.34 781.68,183.64 759.38,161.34 738.42,161.34 731.42,154.34 731.42,145.8 735.38,141.84 735.38,137.34 730.38,132.34 724.08,132.34 v1(714.88,141.54) ; U9.T8@888.89,313.13 888.89,213.83 961.18,141.54 v1(998.38,141.54)
DRAM_A9: U3.AE12 U7.R3 U8.R3 U9.R3 U10.R3 | length 2511.9
  Top Layer w4.7: U8.R3@353.45,344.63 353.46,344.33 358.75,339.04 358.99,339.04 375.51,322.52 375.51,240.34 380.51,235.34 396.45,235.34 401.45,240.34 v1(401.45,248.99) ; v1(655.58,885.69) 661.88,891.99 U3.AE12@661.88,1019.39 ; U10.R3@920.39,344.33 921.78,344.33 942.44,323.68 942.44,240.34 947.44,235.34 963.38,235.34 968.38,240.34 v1(968.38,248.99)
  Signal Layer 2 w4.5: v1(401.45,248.99) 513.73,248.99 538.83,223.89 564.93,223.89 578.38,237.34 628.38,237.34 640.03,248.99 v1(684.88,248.99) 795.73,248.99 807.38,237.34 871.88,237.34 885.33,223.89 919.93,223.89 945.03,248.99 v1(968.38,248.99)
  Bottom Layer w4.7: v1(401.45,248.99) 446.22,248.99 457.39,260.16 457.39,322.57 U7.R3@479.44,344.63 ; v1(655.58,885.69) 655.58,902.05 625.68,931.95 625.68,945.34 620.68,950.34 614.38,950.34 607.88,943.84 607.88,845.54 599.38,837.04 599.38,753.34 604.38,748.34 619.38,748.34 624.38,753.34 624.38,816.34 634.03,825.99 660.24,825.99 669.23,817 669.23,804.28 660.24,795.29 652.08,795.29 648.08,791.29 648.08,732.73 636.99,721.64 629.38,721.64 624.38,716.64 624.38,570.98 600.35,546.95 600.35,492.38 617.08,475.64 617.08,438.94 648.08,407.94 648.08,403.34 666.38,385.04 666.38,305.34 632.38,271.34 632.38,244.34 643.38,233.34 679.38,233.34 684.88,238.84 v1(684.88,248.99) ; v1(968.38,248.99) 1013.15,248.99 1024.32,260.16 1024.32,322.26 1044.93,342.87 U9.R3@1046.37,342.87
DRAM_A10: U3.AA15 U7.L7 U8.L7 U9.L7 U10.L7 | length 2253.2
  Top Layer w4.7: v1(401.45,433.19) 442.03,433.19 U8.L7@479.43,470.61 ; U3.AA15@756.37,1145.37 v1(772.12,1129.62) ; v1(968.38,433.19) 1008.96,433.19 U10.L7@1046.36,470.61
  Signal Layer 1 w4.5: v1(684.88,433.19) 672.53,433.19 660.38,445.34 660.38,514.34 662.38,516.34 666.28,516.34 670.38,520.44 670.38,526.24 666.28,530.34 655.38,530.34 651.63,534.09 651.63,586.09 672.38,606.84 703.38,606.84 708.38,611.84 708.38,698.74 713.38,703.74 733.98,703.74 738.38,708.14 738.38,714.35 733.98,718.75 676.63,718.75 672.38,723 672.38,729.01 676.63,733.25 734.13,733.25 738.38,737.5 738.38,743.5 734.13,747.75 684.63,747.75 680.38,752 680.38,758.01 684.63,762.25 735.63,762.25 739.88,766.5 739.88,772.95 735.62,777.21 715.63,777.21 710.63,782.21 710.63,787.52 715.81,792.71 735.38,792.71 738.38,795.71 738.38,800.34 733.38,805.34 733.38,823.34 742.87,832.83 742.87,840.34 747.87,845.34 753.69,845.34 758.38,850.03 758.38,856.65 753.69,861.34 743.21,861.34 738.38,866.17 738.38,873 743.21,877.83 752.38,877.83 756.88,882.32 756.88,936.89 752.63,941.14 726.58,941.14 722.38,945.34 722.38,965.34 729.38,972.34 747.62,972.34 751.87,968.09 751.87,959.88 756.12,955.64 770.63,955.64 777.38,962.38 777.38,969.53 773.13,973.77 769.63,973.77 765.38,978.02 765.38,984.03 769.63,988.27 773.13,988.27 777.38,992.52 777.38,1010.1 763.38,1024.1 763.38,1053.34 756.87,1059.85 756.87,1105.82 772.12,1121.09 v1(772.12,1129.62)
  Signal Layer 2 w4.5: v1(401.45,433.19) 452.18,433.19 465.33,446.34 559.38,446.34 578.38,427.34 609.38,427.34 623.43,441.39 656.33,441.39 664.53,433.19 v1(684.88,433.19) 760.48,433.19 773.33,420.34 827.39,420.34 839.39,408.34 879.79,408.34 904.64,433.19 v1(968.38,433.19)
  Bottom Layer w4.7: U7.L7@353.46,470.61 347.45,470.6 342.45,465.6 342.45,457.93 347.93,452.45 367.18,452.46 386.45,433.19 v1(401.45,433.19) ; U9.L7@920.39,470.61 914.38,470.6 909.38,465.6 909.38,457.93 914.85,452.46 934.11,452.46 953.38,433.19 v1(968.38,433.19)
DRAM_A11: U3.AC12 U7.R7 U8.R7 U9.R7 U10.R7 | length 2437.5
  Top Layer w4.7: v1(431.45,264.34) 431.45,254.34 436.45,249.34 444.38,249.34 449.38,254.34 449.38,300.33 457.39,308.34 457.39,325.35 476.66,344.62 U8.R7@479.43,344.63 ; v1(646.14,1066.63) U3.AC12@661.88,1082.38 ; v1(998.38,264.34) 998.38,255.34 1003.38,250.34 1010.38,250.34 1015.38,255.34 1015.38,293.4 1024.13,302.15 1024.13,325.09 1043.66,344.62 U10.R7@1046.36,344.63
  Signal Layer 2 w4.5: v1(431.45,264.34) 512.38,264.34 540.38,236.34 560.38,236.34 569.88,245.84 621.88,245.84 640.38,264.34 v1(714.88,264.34) 797.38,264.34 813.38,248.34 875.88,248.34 885.33,238.89 918.93,238.89 935.88,255.84 944.4,264.34 v1(998.38,264.34)
  Bottom Layer w4.7: U7.R7@353.46,344.63 353.46,344.56 376.08,321.94 376.08,282.71 394.45,264.34 v1(431.45,264.34) ; v1(646.14,1066.63) 646.14,1052.1 641.38,1047.34 630.38,1047.34 621.38,1038.34 621.38,1031.34 630.22,1022.5 641.38,1022.5 652.68,1011.2 652.68,943.65 691.68,904.65 691.68,887.9 695.34,884.24 704.48,884.24 709.38,879.34 709.38,872.24 704.38,867.24 693.98,867.24 690.08,863.34 690.08,854.58 695.38,849.28 717.14,849.28 721.31,845.1 721.31,839.58 716.31,834.58 706.62,834.58 702.08,830.04 702.08,781.48 694.38,773.78 678.82,773.78 675.38,770.34 675.38,760.34 678.03,757.69 692.07,757.69 696.38,753.38 696.38,747.29 692.07,742.99 678.49,742.99 674.18,738.68 674.18,732.59 678.49,728.29 693.07,728.29 697.38,723.98 697.38,717.89 693.07,713.59 678.49,713.59 674.18,709.28 674.18,703.19 678.49,698.89 691.07,698.89 695.38,694.58 695.38,688.49 691.07,684.19 681.34,684.19 674.18,677.03 674.18,640.08 664.34,630.24 664.34,618.24 670.34,612.24 684.34,612.24 694.38,602.2 694.38,583.19 707.66,569.9 707.66,562.24 703.34,557.92 703.34,549.24 705.84,546.74 705.84,538.74 703.34,536.24 703.34,529.34 707.34,525.34 722.08,525.34 732.87,514.54 732.87,506.12 726.38,499.63 726.38,489.45 731.89,483.94 731.89,468.82 738.93,461.79 738.93,426.61 733.28,420.96 733.28,412.24 723.53,402.49 706.59,402.49 695.38,391.28 695.38,383 700.23,378.15 700.23,363.5 699.53,362.8 699.53,350.08 700.23,349.38 700.23,332.8 699.53,332.1 699.53,319.38 700.23,318.68 700.23,301.19 694.08,295.04 672.08,295.04 642.38,265.34 642.38,253.34 647.7,248.02 658.06,248.02 674.38,264.34 v1(714.88,264.34) ; U9.R7@920.39,344.63 920.39,344.56 943.01,321.94 943.01,282.71 961.38,264.34 v1(998.38,264.34)
DRAM_A12: U3.AD12 U7.N7 U8.N7 U9.N7 U10.N7 | length 2482
  Top Layer w4.7: v1(401.45,310.39) 431.5,310.39 439.8,318.69 439.8,342.69 465.45,368.34 465.45,393.62 U8.N7@479.43,407.62 ; v1(655.78,846.39) 631.38,870.79 631.38,888.34 646.38,903.34 646.38,1012.62 646.14,1012.86 646.14,1035.14 U3.AD12@661.88,1050.88 ; v1(968.38,310.39) 997.74,310.39 1006.73,319.39 1006.73,342.69 1032.38,368.34 1032.38,393.62 U10.N7@1046.36,407.62
  Signal Layer 1 w4.5: v1(655.78,846.39) 648.38,846.39 645.38,843.39 645.38,831.34 650.38,826.34 668.38,826.34 673.38,831.34 673.38,853.34 664.38,862.34 664.38,872.34 671.38,879.34 671.38,931.34 666.38,936.34 639.13,936.34 634.13,931.34 634.13,925.34 639.13,920.34 653.99,920.34 658.38,915.95 658.38,909.73 653.99,905.34 639.13,905.34 634.13,900.34 634.13,884.34 645.38,873.09 645.38,861.34 634.13,850.09 634.13,753.59 623.38,742.84 623.38,614.34 614.13,605.09 614.13,573.09 582.03,540.99 582.03,508.99 530.38,457.34 530.38,443.34 542.38,431.34 542.38,417.34 525.38,400.34 525.38,370.34 591.38,304.34 678.83,304.34 v1(684.88,310.39)
  Signal Layer 2 w4.5: v1(401.45,310.39) 443.38,310.39 447.43,306.34 531.33,306.34 537.83,312.84 566.88,312.84 574.6,305.12 622.15,305.12 633.37,316.34 647.83,316.34 660.29,303.89 678.38,303.89 v1(684.88,310.39) 739.43,310.39 755.38,326.34 780.38,326.34 795.38,311.34 883.36,311.34 892.86,301.84 ; 892.88,301.84 895.38,299.34 924.38,299.34 936.38,311.34 967.43,311.34 v1(968.38,310.39)
  Bottom Layer w4.7: U7.N7@353.46,407.62 348.45,407.61 344.45,403.61 344.45,393.46 348.44,389.47 359,389.47 360.19,389.46 377.4,372.26 377.4,361.83 377.45,361.78 377.45,358.99 389.1,347.34 389.1,334.73 398.09,325.74 405.45,325.74 409.1,322.09 409.1,319.39 409.45,319.04 409.45,314.39 405.45,310.39 v1(401.45,310.39) ; U9.N7@920.39,407.62 915.38,407.61 911.38,403.61 911.38,393.46 915.37,389.47 925.92,389.47 933.74,381.65 ; 933.74,381.64 944.33,371.05 944.33,361.83 944.38,361.78 944.38,358.99 956.03,347.34 956.03,334.73 965.02,325.74 972.38,325.74 976.38,321.74 976.38,314.39 972.38,310.39 v1(968.38,310.39)
DRAM_A13: U3.AC17 U7.T3 U8.T3 U9.T3 U10.T3 | length 2612.4
  Top Layer w4.7: U8.T3@353.45,313.13 346.15,305.81 346.15,284.57 353.38,277.34 353.38,250.57 346.15,243.34 346.15,224.49 353.31,217.34 368.84,217.34 373.84,212.34 373.84,196.8 383.06,187.59 v1(401.45,187.59) ; U3.AC17@819.36,1082.38 v1(835.11,1066.63) ; U10.T3@920.38,313.13 913.08,305.81 913.08,281.64 921.38,273.34 921.38,253.64 913.08,245.34 913.08,224.49 918.23,219.34 930.38,219.34 940.31,209.41 940.31,197.27 949.98,187.59 v1(968.38,187.59)
  Signal Layer 2 w4.5: v1(401.45,187.59) 502.38,187.59 528.58,161.39 644.18,161.39 670.38,187.59 v1(684.88,187.59) 735.38,187.59 759.08,163.89 927.93,163.89 951.63,187.59 v1(968.38,187.59)
  Bottom Layer w4.7: v1(401.45,187.59) 438.05,187.59 479.44,228.98 U7.T3@479.44,313.13 ; v1(684.88,187.59) 684.88,190.34 679.88,195.34 656.38,195.34 652.08,191.04 652.08,185.74 651.38,185.04 651.38,173.34 633.38,155.34 633.38,106.34 640.38,99.34 748.38,99.34 808.38,159.34 808.38,346.34 794.18,360.54 794.18,390.69 799.83,396.34 799.83,440.45 799.84,487.05 799.28,487.61 793.77,493.11 793.77,868.04 835.11,909.38 v1(835.11,1066.63) ; v1(968.38,187.59) 1004.98,187.59 1046.37,228.98 U9.T3@1046.37,313.13
DRAM_A14: U3.AA12 U7.T7 U8.T7 U9.T7 U10.T7 | length 2546.5
  Top Layer w4.7: v1(431.45,202.94) 449.85,202.94 457.38,210.47 457.38,224.03 463.76,230.41 477.31,230.41 485.75,238.84 485.75,251.34 479.38,257.71 479.38,286.34 485.75,292.71 485.75,308.12 480.75,313.12 U8.T7@479.43,313.13 ; v1(646.14,1129.62) U3.AA12@661.88,1145.37 ; v1(998.38,202.94) 1016.78,202.94 1025.28,211.44 1025.28,223.13 1031.59,229.44 1043.28,229.44 1052.68,238.84 1052.68,252.04 1044.38,260.34 1044.38,284.04 1052.68,292.34 1052.68,306.81 U10.T7@1046.36,313.13
  Signal Layer 2 w4.5: v1(431.45,202.94) 502.78,202.94 529.38,176.34 645.78,176.34 672.38,202.94 v1(714.88,202.94) 739.38,202.94 762.98,179.34 927.38,179.34 950.98,202.94 v1(998.38,202.94)
  Bottom Layer w4.7: U7.T7@353.46,313.13 353.46,277.7 353.57,277.59 353.57,243.22 393.85,202.94 v1(431.45,202.94) ; v1(646.14,1129.62) 655.66,1129.62 671.01,1144.97 684.75,1144.97 692.98,1136.74 692.98,1127.74 698.38,1122.34 707.38,1122.34 714.38,1115.34 714.38,1056.31 718.38,1052.31 718.38,1017.26 714.38,1013.26 714.38,980.34 722.38,972.34 727.78,972.34 766.08,934.04 766.08,880.64 776.37,870.35 776.37,485.89 781.88,480.39 782.44,479.83 782.44,447.68 782.43,403.55 776.78,397.9 776.78,346.34 790.38,332.74 790.38,177.34 736.38,123.34 709.38,123.34 700.23,132.49 700.23,132.55 699.38,133.4 699.38,149.68 700.23,150.53 700.23,165.18 699.53,165.88 699.53,178.6 700.23,179.3 700.23,188.29 v1(714.88,202.94) ; U9.T7@920.39,313.13 920.39,277.7 920.5,277.59 920.5,243.22 960.78,202.94 v1(998.38,202.94)
DRAM_A15: U3.Y12 U7.M7 U8.M7 U9.M7 U10.M7 | length 2401.1
  Top Layer w4.7: v1(401.45,371.79) 438.9,371.79 447.45,380.34 447.45,421.47 465.08,439.1 U8.M7@479.43,439.11 ; v1(646.14,1161.12) U3.Y12@661.88,1176.87 ; v1(968.38,371.79) 1005.83,371.79 1014.38,380.34 1014.38,416.34 1037.14,439.1 U10.M7@1046.36,439.11
  Signal Layer 2 w4.5: v1(401.45,371.79) 446.09,371.79 452.64,378.34 495.88,378.34 505.88,368.34 537.38,368.34 547.38,378.34 564.99,378.34 578.99,364.34 657.93,364.34 665.38,371.79 v1(684.88,371.79) 785.93,371.79 795.38,362.34 822.81,362.34 838.06,347.09 871.04,347.09 895.74,371.79 v1(968.38,371.79)
  Bottom Layer w4.7: U7.M7@353.46,439.11 367.82,439.1 386.1,420.82 386.1,396.13 395.09,387.14 411.38,387.14 416.38,382.14 416.38,376.79 411.38,371.79 v1(401.45,371.79) ; v1(646.14,1161.12) 636.35,1161.12 621,1145.77 606.38,1145.77 599.03,1138.42 599.03,1120.19 605.33,1113.89 623.01,1113.89 629.99,1106.91 629.99,1059.93 621.34,1051.28 612.32,1051.28 607.38,1046.34 607.38,1031.89 643.98,995.29 643.98,940.04 681.38,902.64 681.38,832.2 691.34,822.24 691.34,800.34 665.48,774.48 665.48,645.38 651.34,631.25 651.34,596.24 658.34,589.24 675.34,589.24 694.34,570.24 694.34,534.24 690.34,530.24 681.02,530.24 674.02,523.24 674.02,515.24 679.32,509.94 691.24,509.94 700.23,500.95 700.23,488.24 696.34,484.35 696.34,476.07 700.23,472.18 700.23,468.89 705.23,463.89 721.24,463.89 730.23,454.9 730.23,442.19 721.24,433.19 708.23,433.19 692.88,417.84 677.88,417.84 669.53,426.19 669.53,443.19 660.83,451.89 660.83,477.75 654.34,484.24 630.02,484.24 627.02,481.24 627.02,474.57 631.34,470.24 641.38,470.24 644.38,467.24 644.38,458.28 641.34,455.24 629.78,455.24 625.78,451.24 625.78,442.55 632.09,436.24 650.34,436.24 656.78,429.8 656.78,408.94 669.53,396.19 669.53,396.13 684.88,380.78 v1(684.88,371.79) ; U9.M7@920.39,439.11 932.62,439.1 952.38,419.34 952.38,392.14 957.38,387.14 978.88,387.14 983.38,382.64 983.38,376.29 978.88,371.79 v1(968.38,371.79)
DRAM_CAS_B: U3.AE16 U7.K3 U8.K3 U9.K3 U10.K3 | length 2234
  Top Layer w4.7: U8.K3@353.45,502.11 361.52,494.04 371.06,494.04 371.22,493.88 381.1,493.88 386.1,488.88 386.1,488.18 395.04,479.24 v1(431.45,479.24) ; U3.AE16@787.87,1019.39 787.87,992.85 794.92,985.8 794.92,919.8 v1(802.38,912.34) ; U10.K3@920.38,502.11 939.11,502.1 961.97,479.24 v1(998.38,479.24)
  Signal Layer 1 w4.5: v1(714.88,479.24) 717.77,479.24 749.95,447.06 749.95,411.39 791,370.34 811.38,370.34 835.38,346.34 867.38,346.34 874.38,353.34 874.38,360.34 869.38,365.34 862.38,365.34 857.38,370.34 857.38,377.34 862.38,382.34 872.38,382.34 877.38,387.34 877.38,403.34 872.38,408.34 853.38,408.34 848.38,403.34 848.38,391.34 843.38,386.34 836.63,386.34 831.63,391.34 831.63,396.59 825.63,402.59 825.63,438.34 830.63,443.34 874.38,443.34 878.38,447.34 878.38,465.55 873.09,470.84 863.91,470.84 858.38,476.37 858.38,501.34 854.13,505.59 832.33,505.59 824.33,513.59 801.19,513.59 785.37,529.41 785.37,605.87 776.87,614.37 776.87,817.37 845.39,885.89 845.39,892.93 845.38,946.34 840.38,951.34 827.38,951.34 822.38,946.34 822.38,916.34 818.38,912.34 v1(802.38,912.34)
  Signal Layer 2 w4.5: v1(431.45,479.24) 447.28,479.24 459.38,491.34 476.38,491.34 488.83,478.89 552.66,478.89 557.11,483.34 592.38,483.34 603.38,494.34 654.38,494.34 669.48,479.24 v1(714.88,479.24) 792.48,479.24 801.38,470.34 829.14,470.34 840.18,481.39 854.28,481.39 870.33,465.34 904.38,465.34 918.31,479.27 ; 918.31,479.3 918.34,479.34 v1(998.38,479.24)
  Bottom Layer w4.7: v1(431.45,479.24) 423.45,479.24 419.45,483.24 419.45,488.95 425.09,494.59 471.94,494.59 U7.K3@479.44,502.11 ; v1(998.38,479.24) 990.38,479.24 986.38,483.24 986.38,488.95 992.02,494.59 1027.83,494.59 1035.33,502.1 U9.K3@1046.37,502.11
DRAM_CS0_B: U3.Y16 U7.L2 U8.L2 U9.L2 U10.L2 | length 2393
  Top Layer w4.7: U8.L2@321.95,470.61 321.96,457.83 324.45,455.34 333.45,455.34 336.45,458.34 336.45,479.34 342.45,485.34 367.45,485.34 388.9,463.89 v1(401.45,463.89) ; U3.Y16@787.87,1176.87 v1(803.62,1161.12) ; U10.L2@888.88,470.61 888.89,457.83 891.38,455.34 900.38,455.34 903.38,458.34 903.38,479.34 909.38,485.34 934.38,485.34 955.83,463.89 v1(968.38,463.89)
  Signal Layer 1 w4.5: v1(684.88,463.89) 684.98,463.79 721.19,463.79 741.5,443.48 741.5,406.5 790.16,357.84 802.88,357.84 823.38,337.34 871.38,337.34 889.88,355.84 889.88,493.01 842.55,540.34 829.38,540.34 815.42,526.38 808.34,526.38 802.92,531.8 802.92,538.88 815.38,551.34 815.38,557.95 810.99,562.34 802.38,562.34 793.87,570.85 793.87,609.4 785.37,617.9 785.37,813.84 853.89,882.36 855.38,883.87 855.38,1004.32 841.88,1017.82 841.88,1031.86 819.38,1054.36 819.38,1074.34 811.38,1082.34 797.38,1082.34 787.38,1092.34 787.38,1144.88 v1(803.62,1161.12)
  Signal Layer 2 w4.5: v1(401.45,463.89) 446.43,463.89 455.88,473.34 480.38,473.34 485.38,468.34 557.38,468.34 563.88,474.84 598.38,474.84 606.88,483.34 648.38,483.34 667.83,463.89 v1(684.88,463.89) 731.38,463.89 737.83,470.34 784.38,470.34 790.38,464.34 790.38,463.89 792.93,461.34 832.38,461.34 840.63,453.09 907.04,453.09 924.29,470.34 952.38,470.34 958.83,463.89 v1(968.38,463.89)
  Bottom Layer w4.7: v1(401.45,463.89) 437.81,463.89 458.26,484.34 488.64,484.34 502.38,470.6 U7.L2@510.94,470.61 ; v1(968.38,463.89) 1005.48,463.89 1025.93,484.34 1054.38,484.34 1068.12,470.6 U9.L2@1077.87,470.61
DRAM_D0: U3.AD2 U8.E3 | length 1023.6
  Top Layer w4.7: v1(331.17,1035.14) U3.AD2@346.92,1050.88 ; v1(337.63,675.58) 353.46,659.75 U8.E3@353.45,659.59
  Signal Layer 1 w4.5: v1(331.17,1035.14) 354.38,1035.14 358.38,1031.14 358.38,1019.34 354.38,1015.34 320.38,1015.34 316.38,1011.34 316.38,1004.34 320.38,1000.34 354.38,1000.34 358.38,996.34 358.38,986.34 354.38,982.34 311.38,982.34 307.38,978.34 307.38,958.34 303.38,954.34 295.38,954.34 291.38,958.34 291.38,965.34 287.38,969.34 280.38,969.34 276.38,965.34 276.38,961.34 272.38,957.34 269.43,957.34 265.33,953.24 265.33,947.44 269.43,943.34 295.38,943.34 299.38,939.34 299.38,931.34 295.38,927.34 256.34,927.34 252.38,923.38 252.38,917.77 256.34,913.81 292.43,913.81 296.38,909.86 296.38,904.26 292.43,900.31 255.11,900.31 251.41,896.61 251.41,890.34 255.41,886.34 281.38,886.34 285.38,882.34 285.38,876.34 281.38,872.34 257.38,872.34 253.38,868.34 253.38,862.34 257.38,858.34 278.38,858.34 282.38,854.34 282.38,847.34 278.38,843.34 255.41,843.34 251.41,839.34 251.41,834.34 255.41,830.34 281.38,830.34 285.38,826.34 285.38,821.34 281.38,817.34 251.4,817.34 245.38,811.32 245.38,800.36 250.39,795.35 250.39,793.34 254.39,789.34 264.57,789.34 268.38,785.53 268.38,780.15 264.57,776.34 254.39,776.34 250.39,772.34 250.39,740.59 268.66,722.32 280.97,722.32 289.91,713.39 289.91,695.82 293.91,691.82 329.9,691.82 337.63,684.09 v1(337.63,675.58)
DRAM_D1: U3.AE2 U8.F8 | length 1029
  Top Layer w4.7: v1(316.13,941.99) 316.13,987.99 346.92,1018.78 U3.AE2@346.92,1019.39 ; v1(495.13,644.08) 510.94,628.27 U8.F8@510.93,628.09
  Signal Layer 1 w4.5: v1(316.13,941.99) 316.13,968.34 320.13,972.34 365.38,972.34 369.38,968.34 369.38,931.43 355.83,917.88 350.38,917.88 346.38,921.88 346.38,948.34 342.38,952.34 337.38,952.34 333.38,948.34 333.38,921.88 329.38,917.88 309.38,917.88 305.38,913.88 305.38,902.34 309.38,898.34 335.38,898.34 339.38,894.34 339.38,889.34 335.38,885.34 299.42,885.34 295.42,881.34 295.42,875.34 299.42,871.34 335.38,871.34 339.38,867.34 339.38,857.81 336.6,855.02 295.42,855.02 292.64,852.24 292.64,843.34 296.64,839.34 335.38,839.34 339.38,835.34 339.38,827.43 335.38,823.43 300.98,823.43 289.89,812.34 289.89,733.26 290.89,732.27 300.54,722.59 345.39,722.59 353.39,714.59 353.39,699.59 361.39,691.59 374.68,691.59 393.93,672.34 442.6,672.34 447.87,667.08 ; 447.9,667.08 455.39,659.59 479.13,659.59 494.64,644.08 v1(495.13,644.08)
DRAM_D2: U3.AC4 U8.G2 | length 1029.7
  Top Layer w4.7: v1(306.18,612.34) 306.18,612.04 321.63,596.58 U8.G2@321.95,596.59 ; v1(394.17,1097.75) 409.54,1082.38 U3.AC4@409.92,1082.38
  Signal Layer 1 w4.5: v1(306.18,612.34) 297.38,612.34 281.89,627.83 268.89,627.83 265.33,631.39 257.83,631.39 252.83,626.39 252.83,613.7 246.47,607.34 229.16,607.34 198.18,638.32 198.18,665.45 193.38,670.25 193.38,674.95 198.18,679.75 198.18,684.45 193.38,689.25 193.38,693.95 198.18,698.75 198.18,703.45 193.38,708.25 193.38,712.95 198.18,717.75 198.18,722.45 193.38,727.25 193.38,731.95 198.18,736.75 198.18,741.45 193.38,746.25 193.38,750.95 198.18,755.75 198.18,760.45 193.38,765.25 193.38,769.95 198.18,774.75 198.18,779.45 193.38,784.25 193.38,788.95 198.18,793.75 198.18,798.45 193.38,803.25 193.38,807.95 198.18,812.75 198.18,817.45 193.38,822.25 193.38,826.95 198.18,831.75 198.18,836.45 193.38,841.25 193.38,845.95 198.18,850.75 198.18,855.45 193.38,860.25 193.38,864.95 198.18,869.75 198.18,874.45 193.38,879.25 193.38,883.95 198.18,888.75 198.18,893.45 193.38,898.25 193.38,902.95 198.18,907.75 198.18,912.45 193.38,917.25 193.38,921.95 198.18,926.75 198.18,931.45 193.38,936.25 193.38,940.95 198.18,945.75 198.18,950.45 193.38,955.25 193.38,959.95 198.18,964.75 198.18,1004.17 276.89,1082.88 302.38,1082.88 306.38,1086.88 306.38,1115.34 310.38,1119.34 316.38,1119.34 320.38,1115.34 320.38,1086.88 324.38,1082.88 330.38,1082.88 334.38,1086.88 334.38,1115.07 338.2,1118.89 343.6,1118.89 347.42,1115.07 347.42,1085.3 350.38,1082.34 371.91,1082.34 377.92,1088.35 377.92,1108.93 383.38,1114.39 398.38,1114.39 401.91,1110.86 401.91,1101.28 398.38,1097.75 v1(394.17,1097.75)